# EAGLE board Raspberry Pi (EAGLE 9.6.2)
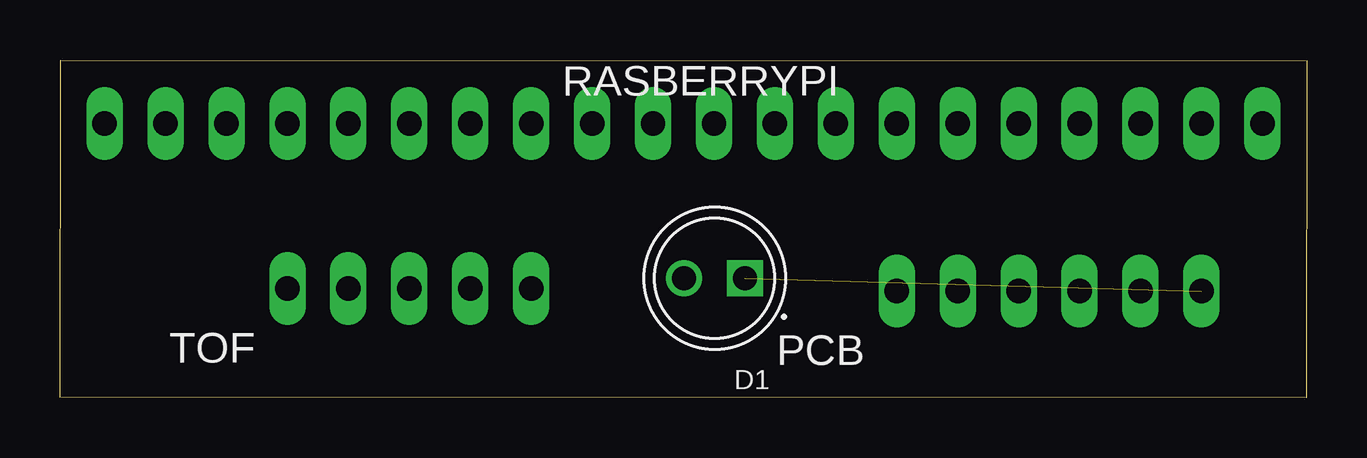
[diagram p0: board, top side]
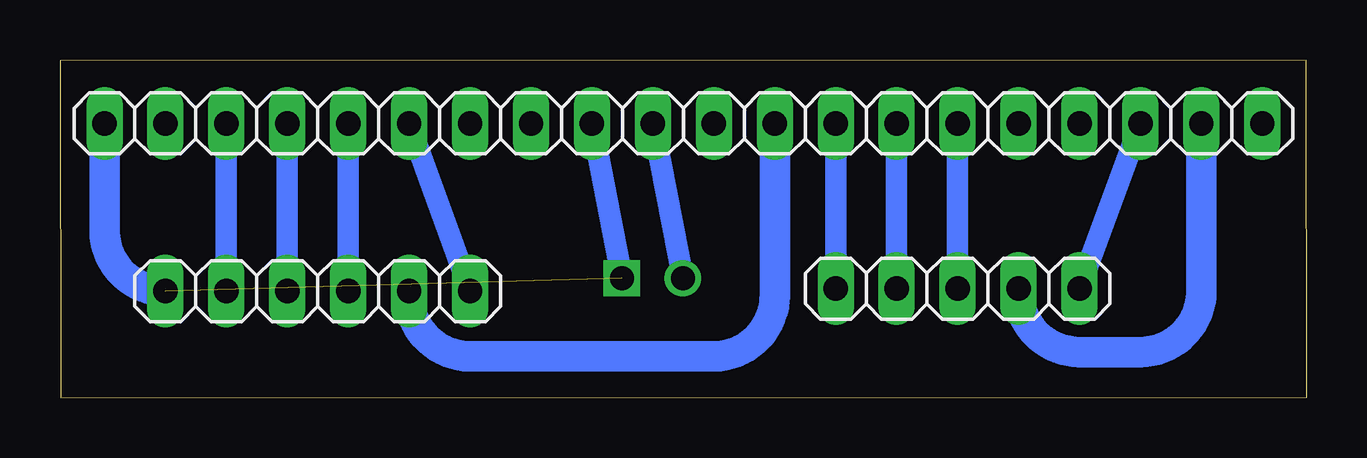
[diagram p1: board, bottom side, seen from below]

Size 51.97 x 14.07 mm. Coordinates in mm from the lower left corner, seen from the top.
Outline: 51.95,0 0,0.03 0.03,14.07 51.97,14.05 51.95,0
Copper layers (1*16): Top 0.035mm / dielectric 1.5mm / Bottom 0.035mm
Design rules "default": minimum track width 6mil, minimum drill 0.35mm, track to track 6mil, track to pad 6mil, pad to pad 6mil, via to via 6mil, smd to smd 6mil, copper to edge 40mil, drill to drill 6mil, minimum pad ring 10mil, minimum via ring 8mil, stop-mask expansion 4mil, vias tented up to drill 0mil, thermal gap 10mil

## Footprints (pad centres in the part's own frame; a part is rotated, then mirrored left to right if it is on the bottom)
LED_WP7113SRD/D = drill 1: A 1.27,0 | drill 1 square: C -1.27,0
1X06 = drill 1.016 long: 1 -6.35,0; 2 -3.81,0; 3 -1.27,0; 4 1.27,0; 5 3.81,0; 6 6.35,0
1X20 = drill 1.016 long: 1 -24.13,0; 2 -21.59,0; 3 -19.05,0; 4 -16.51,0; 5 -13.97,0; 6 -11.43,0; 7 -8.89,0; 8 -6.35,0; 9 -3.81,0; 10 -1.27,0; 11 1.27,0; 12 3.81,0; 13 6.35,0; 14 8.89,0; 15 11.43,0; 16 13.97,0; 17 16.51,0; 18 19.05,0; 19 21.59,0; 20 24.13,0
1X05 = drill 1.016 long: 1 -5.08,0; 2 -2.54,0; 3 0,0; 4 2.54,0; 5 5.08,0

## Placement (x,y rotation side)
D1  WP7113SRD/D  [LED_WP7113SRD/D]  27.29,4.98 180 top
PCB  [1X06]  41.23,4.44 180 bottom
RASBERRYPI  [1X20]  25.99,11.43 0 bottom
TOF  [1X05]  14.56,4.55 180 bottom

## Library data of the parts
D1 = WP7113SRD_D; AVAILABILITY: In Stock; CHECK_PRICES: https://www.snapeda.com/parts/WP7113SRD/D/Kingbright/view-part/?ref=eda; DESCRIPTION: Red 640nm LED Indication - Discrete 1.85V Radial; MF: Kingbright; MP: WP7113SRD/D; PACKAGE: Radial Kingbright; PRICE: None; SNAPEDA_LINK: https://www.snapeda.com/parts/WP7113SRD/D/Kingbright/view-part/?ref=snap
PCB RASBERRYPI TOF = pinhead

## Nets
3.3V: PCB.2 RASBERRYPI.12
GND: D1.C PCB.6 RASBERRYPI.1 RASBERRYPI.9
LED: D1.A RASBERRYPI.10
PIN4: PCB.1 RASBERRYPI.6
SCL: RASBERRYPI.18 TOF.1
SDA: RASBERRYPI.19 TOF.2
SERVO1: PCB.3 RASBERRYPI.5
SERVO2: PCB.4 RASBERRYPI.4
SERVO3: PCB.5 RASBERRYPI.3
TOF1: RASBERRYPI.13 TOF.5
TOF2: RASBERRYPI.14 TOF.4
TOF3: RASBERRYPI.15 TOF.3

## Tracks (layer width: path | path; a pad name or v marks a point on that pad's centre or on a via)
3.3V
  Bottom 1.27: PCB.2 37.42,4.27 arc-90 34.88,1.73 24.72,1.73 arc-90 22.18,4.27 RASBERRYPI.12
GND  (1 unrouted)
  Bottom 0.889: D1.C RASBERRYPI.9
  Bottom 1.27: PCB.6 arc90 50.12,6.99 RASBERRYPI.1
LED
  Bottom 0.889: D1.A RASBERRYPI.10
PIN4
  Bottom 0.889: PCB.1 RASBERRYPI.6
SCL
  Bottom 0.889: TOF.1 RASBERRYPI.18
SDA
  Bottom 1.27: RASBERRYPI.19 4.4,4.45 arc90 6.94,1.91 9.48,1.91 arc90 12.02,4.45 TOF.2
SERVO1
  Bottom 0.889: RASBERRYPI.5 PCB.3
SERVO2
  Bottom 0.889: RASBERRYPI.4 PCB.4
SERVO3
  Bottom 0.889: RASBERRYPI.3 PCB.5
TOF1
  Bottom 0.889: RASBERRYPI.13 TOF.5
TOF2
  Bottom 0.889: RASBERRYPI.14 TOF.4
TOF3
  Bottom 0.889: RASBERRYPI.15 TOF.3